# EAGLE board Diagrama-Eduproto (EAGLE 8.3.2)
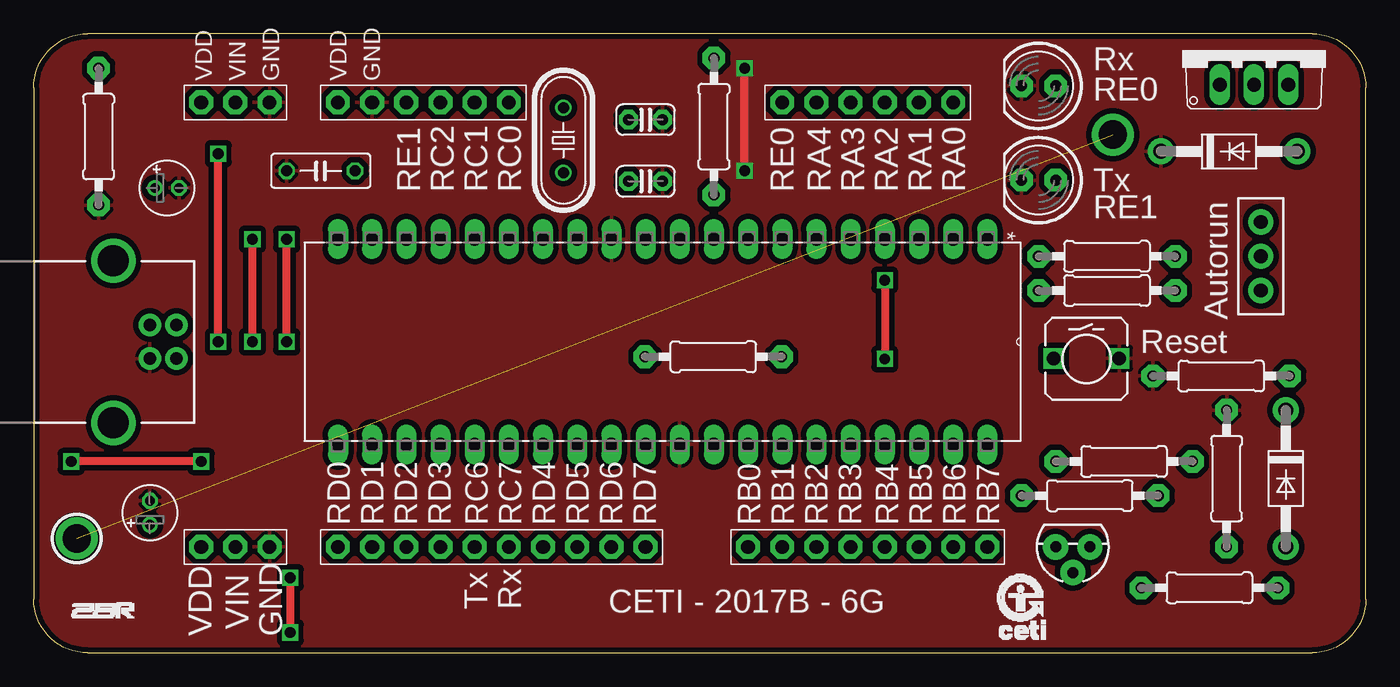
[diagram p0: board, top side]
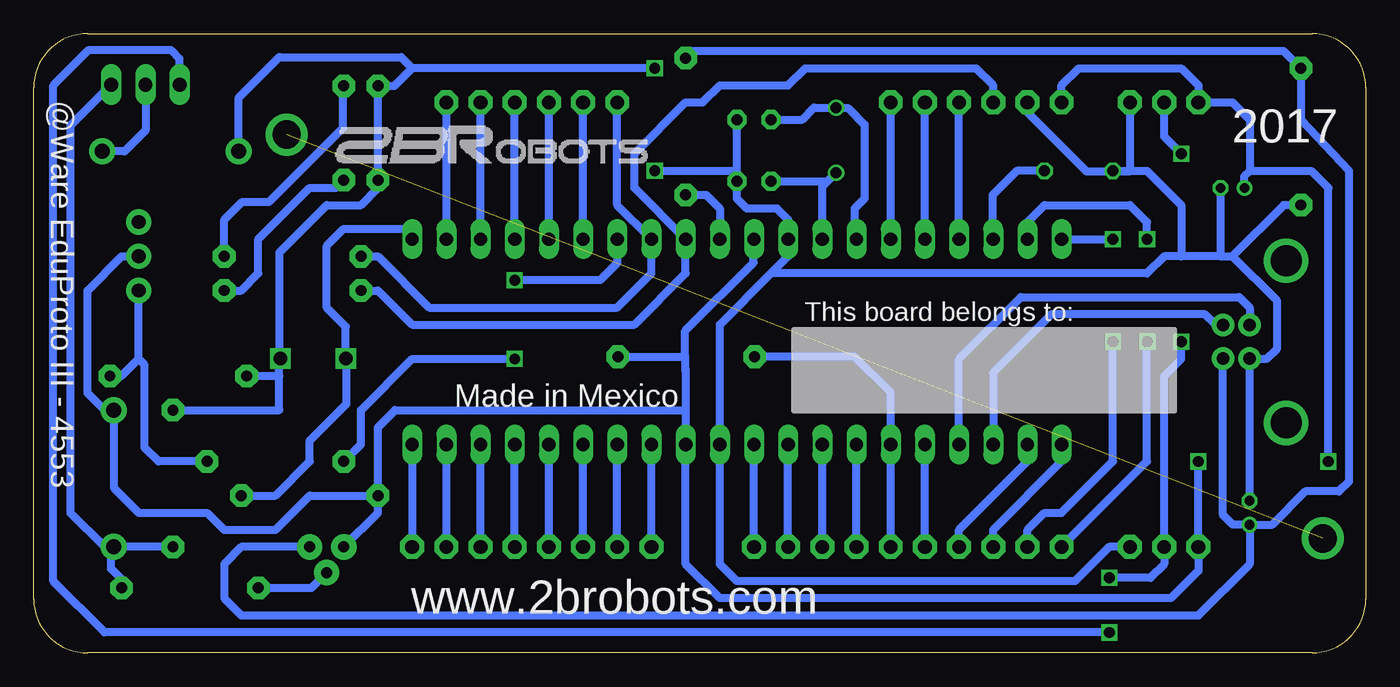
[diagram p1: board, bottom side, seen from below]

Size 99 x 46 mm. Coordinates in mm from the lower left corner, seen from the top.
Outline: 4,0 95,0 arc90 99,4 99,42 arc90 95,46 4,46 arc90 0,42 0,4 arc90 4,0
Copper layers (1*16): Top 0.0356mm / dielectric 1.5011mm / Bottom 0.0356mm
Design rules "2brobots-2layer": minimum track width 6mil, minimum drill 0.3mm, track to track 6mil, track to pad 6mil, pad to pad 6mil, via to via 6mil, smd to smd 6mil, copper to edge 15mil, drill to drill 6mil, minimum pad ring 7mil, minimum via ring 7mil, stop-mask expansion 2.5mil, vias tented up to drill 50mil, thermal gap 10mil

## Footprints (pad centres in the part's own frame; a part is rotated, then mirrored left to right if it is on the bottom)
E1,8-4 = drill 0.711 pad 1.168: + -0.889,0 | drill 0.711 pad 1.168 octagon: - 0.889,0
C025-024X044 = drill 0.813 pad 1.422 octagon: 1 -1.27,0; 2 1.27,0
C050-025X075 = drill 0.813 octagon: 1 -2.54,0; 2 2.54,0
DO41-10 = drill 1.118 pad 1.93: A 5.08,0; C -5.08,0
TO220V = drill 1.016 long: 1 -2.54,-2.54; 2 0,-2.54; 3 2.54,-2.54
USB-B-PTH = drill 0.914 pad 1.676: D+ 0,1.25; D- 1.981,1.25; GND 0,-1.25; VBUS 1.981,-1.25 | drill 2.286: S1 -2.718,-6.02; S2 -2.718,6.02
1X08-BIG = drill 1.016 pad 1.778 octagon: 1 -8.89,0; 2 -6.35,0; 3 -3.81,0; 4 -1.27,0; 5 1.27,0; 6 3.81,0; 7 6.35,0; 8 8.89,0
1X06-BIG = drill 1.016 pad 1.778 octagon: 1 -6.35,0; 2 -3.81,0; 3 -1.27,0; 4 1.27,0; 5 3.81,0; 6 6.35,0
1X03-CLEANBIG = drill 1.016 pad 1.778 octagon: 1 -2.54,0; 2 0,0; 3 2.54,0
LED5MM = drill 0.813 pad 1.676 octagon: A -1.27,0; K 1.27,0
HC49/S = drill 0.813: 1 -2.413,0; 2 2.413,0
TO-92 = drill 0.813 pad 1.88: 1 -1.27,0; 2 0,1.905; 3 1.27,0
0207/10 = drill 0.813 pad 1.676 octagon: 1 -5.08,0; 2 5.08,0
SWITCH_SPDT_PTH_11.6X4.0MM = drill 1.016 pad 1.88: 1 0,2.54; 2 0,0; 3 0,-2.54
DIP254P1524X635-40 = drill 0.991 long: 1 -15.24,48.26; 2 -15.24,45.72; 3 -15.24,43.18; 4 -15.24,40.64; 5 -15.24,38.1; 6 -15.24,35.56; 7 -15.24,33.02; 8 -15.24,30.48; 9 -15.24,27.94; 10 -15.24,25.4; 11 -15.24,22.86; 12 -15.24,20.32; 13 -15.24,17.78; 14 -15.24,15.24; 15 -15.24,12.7; 16 -15.24,10.16; 17 -15.24,7.62; 18 -15.24,5.08; 19 -15.24,2.54; 20 -15.24,0; 21 0,0; 22 0,2.54; 23 0,5.08; 24 0,7.62; 25 0,10.16; 26 0,12.7; 27 0,15.24; 28 0,17.78; 29 0,20.32; 30 0,22.86; 31 0,25.4; 32 0,27.94; 33 0,30.48; 34 0,33.02; 35 0,35.56; 36 0,38.1; 37 0,40.64; 38 0,43.18; 39 0,45.72; 40 0,48.26
1X10-BIG = drill 1.016 pad 1.778 octagon: 1 -11.43,0; 2 -8.89,0; 3 -6.35,0; 4 -3.81,0; 5 -1.27,0; 6 1.27,0; 7 3.81,0; 8 6.35,0; 9 8.89,0; 10 11.43,0
TAC-SWITCH-PTH-2P = drill 1.016 pad 1.524 square: 1 -2.434,0.038; 2 2.434,0.038

## Placement (x,y rotation side)
C1  10uF  [E1,8-4]  8.64,10.41 90 top
C2  1uF  [E1,8-4]  9.91,34.54 0 top
C3  22pF  [C025-024X044]  45.47,39.62 0 top
C4  22pF  [C025-024X044]  45.47,35.04 0 top
C5  220nF  [C050-025X075]  21.34,35.81 180 top
D1  1N4004  [DO41-10]  88.84,37.25 0 top
D2  1N4004  [DO41-10]  93.05,12.95 270 top
IC1  7805TV  [TO220V]  90.69,44.75 0 top
JP1  USB-B  [USB-B-PTH]  8.64,23.11 0 top
JP2  [1X08-BIG]  61.98,7.87 0 top
JP4  [1X06-BIG]  61.98,40.89 180 top
JP5  [1X06-BIG]  28.96,40.89 180 top
JP6  [1X03-CLEANBIG]  14.99,40.89 0 top
JP7  [1X03-CLEANBIG]  14.99,7.87 0 top
LED1  [LED5MM]  74.68,35.12 180 top
LED2  [LED5MM]  74.68,42.12 180 top
Q1  4MHz  [HC49/S]  39.37,38.08 90 top
Q2  [TO-92]  77.22,7.87 180 top
R1  1K  [0207/10]  88.65,12.95 270 top
R2  1K  [0207/10]  87.38,4.83 180 top
R3  100K  [0207/10]  4.83,38.35 90 top
R4  100K  [0207/10]  50.55,39.1 270 top
R5  47k  [0207/10]  50.5,22 0 top
R6  330  [0207/10]  79.76,26.92 180 top
R7  330  [0207/10]  79.76,29.46 180 top
R8  10K  [0207/10]  88.25,20.57 180 top
R9  4.7K  [0207/10]  78.49,11.68 0 top
R10  10K  [0207/10]  81.03,14.22 180 top
S2  [SWITCH_SPDT_PTH_11.6X4.0MM]  91.19,29.46 180 top
U$1  PIC18F4553-I/P  [DIP254P1524X635-40]  22.61,15.49 270 top
U$3  PINHD-1X10  [1X10-BIG]  34.04,7.87 0 top
U$5  TACTILE-SWITCH-2P  [TAC-SWITCH-PTH-2P]  78.24,21.84 0 top

## Library data of the parts
C1-C5 D1 D2 JP2 JP4-JP7 LED1 LED2 R1-R10 U$3 = adafruit
IC1 = linear
JP1 = SparkFun-Connectors; PROD_ID: CONN-08278
Q1 = adafruit; OC_FARNELL: 1667008; OC_NEWARK: unknown
Q2 = SparkFun-DiscreteSemi
S2 = SparkFun-Switches; PROD_ID: SWCH-08261; SF_SKU: COM-00102
U$1 = PIC 18F4553; DESCRIPTION: USB Microcontrollers; MPN: PIC18F4553-I/P; OC_FARNELL: 1579608; OC_NEWARK: 54M5025; PACKAGE: DIP-40; SUPPLIER: Microchip
U$5 = GeekAmmo

## Nets
AUTORUN: R10.2 U$1.7
D+: JP1.D+ U$1.24
D-: JP1.D- U$1.23
EN: Q2.2 R2.2
GND: C1.- C2.- C3.2 C4.2 C5.2 D1.C JP1.GND JP5.5 JP6.3 JP7.3 LED1.K LED2.K R1.1 R3.1 R8.2 U$1.12 U$1.31 U$5.2
N$2: D1.A IC1.2
N$3: R8.1 R10.1 S2.1
N$4: D2.A IC1.3 R1.2 R2.1
N$11: LED1.A R6.1
N$12: LED2.A R7.1
OSC1: C4.1 Q1.1 U$1.13
OSC2: C3.1 Q1.2 U$1.14
RA0: JP4.1 U$1.2
RA1: JP4.2 U$1.3
RA2: JP4.3 U$1.4
RA3: JP4.4 U$1.5
RA4: JP4.5 U$1.6
RB0: JP2.1 U$1.33
RB1: JP2.2 U$1.34
RB2: JP2.3 U$1.35
RB3: JP2.4 U$1.36
RB4: JP2.5 U$1.37
RB5: JP2.6 U$1.38
RB6: JP2.7 U$1.39
RB7: JP2.8 U$1.40
RC0: JP5.1 U$1.15
RC1: JP5.2 U$1.16
RC2: JP5.3 U$1.17
RC6: U$1.25 U$3.5
RC7: R5.1 U$1.26 U$3.6
RD0: U$1.19 U$3.1
RD1: U$1.20 U$3.2
RD2: U$1.21 U$3.3
RD3: U$1.22 U$3.4
RD4: U$1.27 U$3.7
RD5: U$1.28 U$3.8
RD6: U$1.29 U$3.9
RD7: U$1.30 U$3.10
RESET: R9.2 U$1.1 U$5.1
RXLED: JP4.6 R7.2 U$1.8
SENSEUSB: R4.2 U$1.10
TXLED: JP5.4 R6.2 U$1.9
VBUS: C1.+ JP1.VBUS Q2.1 R3.2 R4.1
VDD: C2.+ D2.C JP5.6 JP6.1 JP7.1 Q2.3 R5.2 R9.1 S2.2 U$1.11 U$1.32
VIN: IC1.1 JP6.2 JP7.2
VUSB: C5.1 U$1.18

## Tracks (layer width: path | path; a pad name or v marks a point on that pad's centre or on a via)
AUTORUN  (via drill 0.8)
  Top 0.61: v63.25,27.69 v63.25,21.84
  Bottom 0.61: U$1.7 55.63,28.96 56.9,27.69 v63.25,27.69 | R10.2 74.68,15.49 74.68,18.03 70.87,21.84 v63.25,21.84
D+
  Bottom 0.61: U$1.24 30.23,21.84 25.65,26.42 9.41,26.42 8.64,25.65 JP1.D+
D-
  Bottom 0.61: JP1.D- 11.16,24.36 11.95,25.15 23.38,25.15 27.69,20.84 U$1.23
EN
  Bottom 0.61: R2.2 78.36,4.83 Q2.2
GND  (via drill 0.8)
  Top 0.61: v52.84,35.81 v52.84,43.43
  Bottom 0.61: 80.75,20.57 80.75,18.03 R1.1 | 70.87,43.43 72.18,42.12 LED2.K LED1.K 73.41,34.54 74.68,33.27 77.22,33.27 80.75,29.74 80.75,23.25 | 44.2,28.19 48.01,24.38 U$1.31 48.01,6.6 46.74,5.33 21.61,5.33 19.07,7.87 JP7.3 | 44.2,28.19 42.93,29.46 U$1.12 42.93,32.18 43.75,33 46,33 46.75,33.75 C4.2 46.74,35.5 | 13.72,29.46 13.72,33.27 16.26,35.81 C5.2 17.59,35.75 | 9.91,29.46 6.6,26.15 6.6,22.61 7.35,21.86 JP1.GND C1.- | 10.75,29.46 9.91,29.46 | 10.75,29.46 13.72,29.46 | 13.72,29.46 14.99,29.46 16.26,28.19 44.2,28.19 | v52.84,43.43 70.87,43.43 | R3.1 6.1,33.27 9.91,29.46 | R8.2 80.75,20.57 | 70.87,43.43 71.69,44.25 80.75,44.25 83.76,41.24 D1.C | JP5.5 25.15,40.15 20.75,35.75 17.59,35.75 | 80.75,23.25 | 80.75,23.25 80.75,21.95 U$5.2 80.75,21.8 80.75,20.57 | C2.- 10.8,29.51 10.75,29.46 | JP6.3 17.53,35.81 17.59,35.75 | 46.74,35.5 C3.2 | 46.74,35.5 47.05,35.81 v52.84,35.81
  pour Top (isolate 0.406): 0,46 0,0 99,0 99,46
N$1  (via drill 2.1 pad 2.54)  (1 unrouted)
  other vias: 3.2,8.5 80.2,38.5
N$2
  Bottom 0.61: 90.75,42.15 IC1.2 90.69,38.81 92.25,37.25 D1.A
N$3
  Bottom 0.61: R10.1 89.72,14.22 90.75,15.25 90.75,21.4 91.19,21.84 | R8.1 92.46,20.57 91.19,21.84 | 91.19,21.84 S2.1
N$4
  Bottom 0.61: R1.2 D2.A | D2.A 93.73,7.87 96.27,10.41 96.27,39.17 IC1.3 | R2.1 92.46,5.46 93.25,6.25 93.25,7.67 D2.A
N$11
  Bottom 0.61: R6.1 83.57,26.92 82.3,28.19 82.3,30.73 78.49,34.54 76.53,34.54 LED1.A
N$12
  Bottom 0.61: LED2.A 76,42.07 76,39 81.5,33.5 83.5,33.5 84.84,32.16 R7.1
OSC1
  Bottom 0.61: U$1.13 40.39,34.65 40.02,35.02 | 40.02,35.02 Q1.1 | C4.1 40.04,35.04 40.02,35.02
OSC2
  Bottom 0.61: U$1.14 38,30.88 38,33 37.25,33.75 37.25,39.25 38.49,40.49 Q1.2 41,40.5 41.88,39.62 C3.1
RA0
  Bottom 0.61: U$1.2 JP4.1
RA1
  Bottom 0.61: U$1.3 JP4.2
RA2
  Bottom 0.61: U$1.4 JP4.3
RA3
  Bottom 0.61: U$1.5 JP4.4
RA4
  Bottom 0.61: U$1.6 JP4.5
RB0
  Bottom 0.61: JP2.1 U$1.33
RB1
  Bottom 0.61: JP2.2 U$1.34
RB2
  Bottom 0.61: JP2.3 U$1.35
RB3
  Bottom 0.61: JP2.4 U$1.36
RB4
  Bottom 0.61: JP2.5 U$1.37
RB5
  Bottom 0.61: JP2.6 U$1.38
RB6
  Bottom 0.61: JP2.7 U$1.39
RB7
  Bottom 0.61: U$1.40 JP2.8
RC0
  Bottom 0.61: U$1.15 JP5.1
RC1
  Bottom 0.61: U$1.16 JP5.2
RC2
  Bottom 0.61: U$1.17 JP5.3
RC6
  Bottom 0.61: U$3.5 U$1.25
RC7
  Bottom 0.61: U$3.6 U$1.26 | 35.25,15.55 U$1.26 | U$1.26 35.31,19.31 38,22 R5.1
RD0  (via drill 0.8)
  Top 0.61: v16.26,23.11 v16.26,30.73
  Bottom 0.61: v16.26,23.11 16.26,14.22 U$3.1 | U$1.19 25.15,32 23.88,33.27 17.53,33.27 16.26,32 v16.26,30.73
RD1  (via drill 0.8)
  Top 0.61: v18.8,23.11 v18.8,30.73
  Bottom 0.61: v18.8,23.11 18.8,14.22 22.61,10.41 23.88,10.41 25.15,9.14 U$3.2 | U$1.20 v18.8,30.73
RD2
  Bottom 0.61: U$3.3 27.69,9.14 22.61,14.22 U$1.21
RD3
  Bottom 0.61: U$3.4 30.23,9.14 25.15,14.22 U$1.22
RD4
  Bottom 0.61: U$3.7 U$1.27
RD5
  Bottom 0.61: U$3.8 U$1.28
RD6
  Bottom 0.61: U$3.9 U$1.29
RD7
  Bottom 0.61: U$3.10 U$1.30
RESET
  Bottom 0.61: U$1.1 71.14,31.5 75.95,31.5 77.22,30.23 77.22,25.65 75.81,24.24 U$5.1 75.75,21.82 75.75,18.5 76.22,18.03 76.23,18.03 78.49,15.77 78.49,14.22 81.03,11.68 R9.2
RXLED
  Bottom 0.61: R7.2 73.41,29.46 69.6,25.65 55.63,25.65 53.09,28.19 U$1.8 55.63,33.27 JP4.6
SENSEUSB
  Bottom 0.61: 48.01,32 U$1.10 48,33 49.02,34.02 R4.2
TXLED
  Bottom 0.61: R6.2 73.41,26.92 70.87,24.38 54.36,24.38 50.55,28.19 U$1.9 54.36,34.54 54.36,37.08 50.55,40.89 49.28,40.89 48.01,42.16 42.93,42.16 41.66,43.43 28.96,43.43 27.69,42.16 JP5.4
VBUS
  Bottom 0.61: Q2.1 83.57,7.87 84.84,6.6 84.84,4.06 83.57,2.79 12.45,2.79 8.64,6.6 8.64,9.5 | 8.64,9.5 C1.+ 9.89,9.52 10.62,10.25 JP1.VBUS | R4.1 50.03,44.7 6.1,44.7 R3.2 4.83,39.62 1.27,35.81 1.27,12.73 2,12 4.5,12 7,9.5 8.64,9.5
VDD  (via drill 0.8)
  Top 0.61: v12.45,14.22 v2.79,14.22
  Bottom 0.61: 50.55,18.03 50.55,21 50.58,21.03 50.58,22 | 50.55,18.03 U$1.32 50.55,6.6 48.01,4.06 14.49,4.06 12.45,6.1 JP7.1 v12.45,14.22 | 50.55,18.03 72.14,18.03 73.41,16.76 R9.1 | Q2.3 73.41,10.41 R9.1 | v2.79,14.22 2.79,34.54 4.06,35.81 8.64,35.81 | R9.1 78.49,11.68 81.03,9.14 84.84,9.14 86.11,10.41 91.19,10.41 93.05,12.27 D2.C 93.73,18.03 95,19.3 95,26.92 92.46,29.46 S2.2 | 8.64,35.81 8.64,39.62 9.91,40.89 JP6.1 12.45,42.16 13.72,43.43 21.34,43.43 22.61,42.16 JP5.6 | C2.+ 9.02,35.43 8.64,35.81 | U$1.11 45.5,30.7 45.5,29 50.58,23.92 50.58,22 | R5.2 50.58,22
VIN  (via drill 0.8)
  Top 0.61: v13.72,23.11 v13.72,37.08 | v19.07,5.58 v19.07,1.52
  Bottom 0.61: v13.72,23.11 13.72,21.84 14.99,20.57 JP7.2 14.99,6.6 16.01,5.58 v19.07,5.58 | v13.72,37.08 14.99,38.35 JP6.2 | v19.07,1.52 93.73,1.52 97.54,5.33 97.54,42.16 94.95,44.75 88.75,44.75 88.15,44.15 IC1.1
VUSB
  Bottom 0.61: C5.1 25.94,35.81 27.75,34 27.75,30.79 U$1.18

## Text on the board
bPlace: @Ware EduProto III - 4553 | 2017 | This board belongs to: | Made in Mexico | www.2brobots.com
tNames: Rx | VDD | VIN | GND | VDD | GND | RE0 | RE1 | RC2 | RC1 | RC0 | RE0 | RA4 | RA3 | RA2 | RA1 | RA0 | Tx | RE1 | Autorun | Reset | RD0 | RD1 | RD2 | RD3 | RC6 | RC7 | RD4 | RD5 | RD6 | RD7 | RB0 | RB1 | RB2 | RB3 | RB4 | RB5 | RB6 | RB7 | Tx | Rx | CETI - 2017B - 6G | VIN | VDD | GND